# EAGLE board optics_r001 (EAGLE 7.7.0)

Size 65 x 38 mm. Coordinates in mm from the lower left corner, seen from the top.
Outline: 0,0 65,0 65,38 0,38 0,0
Copper layers (1*16): Top 0.035mm / dielectric 1.5mm / Bottom 0.035mm
Design rules "default": minimum track width 10mil, minimum drill 24mil, track to track 8mil, track to pad 8mil, pad to pad 8mil, via to via 8mil, smd to smd 8mil, copper to edge 40mil, drill to drill 8mil, minimum pad ring 10mil, minimum via ring 8mil, stop-mask expansion 4mil, vias tented up to drill 0mil, thermal gap 10mil
Net classes: 1 PWR: width 0.305 mm

## Footprints (pad centres in the part's own frame; a part is rotated, then mirrored left to right if it is on the bottom)
0805_WAVE = smd 1.3 x 1.6: 1 1.1,0; 2 -1.1,0
TO38-ICUT-PL_450B = drill 0.508 pad 0.813: 1 -0.715,0; 2 0,-0.715; 3 0.715,0
TO5-QP10-6 = drill 0.737: 1 0,2.54; 2 -2.54,0; 3 0,-2.54; 4 2.54,0; 5 1.796,1.796
1206_WAVE = smd 1.4 x 1.95: 1 1.4,0; 2 -1.4,0
M3 = drill 3.15 pad 6: 1 0,0
M2 = drill 2.1 pad 4: 1 0,0
V-LH09 = drill 1.55 pad 3.1: 1 -9,0; 2 9,0
SOT23-3 = smd 0.7 x 0.9: 1 -0.95,-1; 2 0.95,-1; 3 0,1
T93YB = drill 0.61: 1 -1.9,2.54; 2 0.64,0; 3 -1.9,-2.54
PAD_RECT_5X2.5 = smd 5 x 2.5: 1 0,0
PAD_CIRCLE_1.5 = smd 1.5 x 1.5: 1 0,0
PAD_OVAL_3X1.5 = smd 3 x 1.5: 1 0,0
PAD_CIRCLE_2 = smd 2 x 2: 1 0,0
MSOP8 = smd 1.45 x 0.45: 1 -2,0.975; 2 -2,0.325; 3 -2,-0.325; 4 -2,-0.975; 5 2,-0.975; 6 2,-0.325; 7 2,0.325; 8 2,0.975
MSOP8-TP = smd 1.45 x 0.45: 1 -2,0.975; 2 -2,0.325; 3 -2,-0.325; 4 -2,-0.975; 5 2,-0.975; 6 2,-0.325; 7 2,0.325; 8 2,0.975 | smd 1.75 x 2.4: 9 0,0
90120-0130 = drill 1 square: 1 0,11.43 | drill 1: 2 0,8.89; 3 0,6.35; 4 0,3.81; 5 0,1.27; 6 0,-1.27; 7 0,-3.81; 8 0,-6.35; 9 0,-8.89; 10 0,-11.43
MIKROBUS_BUS_SOCKET_NO_OUTLINE_COMPACT = drill 0.787 pad 1.524 square: 1 -11,9; 16 11.86,9 | drill 0.787 pad 1.524: 2 -11,6.46; 3 -11,3.92; 4 -11,1.38; 5 -11,-1.16; 6 -11,-3.7; 7 -11,-6.24; 8 -11,-8.78; 9 11.86,-8.78; 10 11.86,-6.24; 11 11.86,-3.7; 12 11.86,-1.16; 13 11.86,1.38; 14 11.86,3.92; 15 11.86,6.46
22-28-4030 = drill 1.016 pad 1.676 square: 1 0,2.54 | drill 1.016 pad 1.524 octagon: 2 0,0; 3 0,-2.54

## Placement (x,y rotation side)
C1  1u  [0805_WAVE]  18.5,16.5 180 top
C2  100n  [0805_WAVE]  34,24 270 bottom
C3  2.2n  [0805_WAVE]  34,19 90 bottom
C4  47n  [0805_WAVE]  38,33.5 0 bottom
C101  2p  [0805_WAVE]  56,28.5 90 top
C102  100p  [0805_WAVE]  48,27.5 0 top
C201  2p  [0805_WAVE]  47,33.5 270 top
C202  100p  [0805_WAVE]  55,34.5 180 top
C301  2p  [0805_WAVE]  47,9.5 270 top
C302  100p  [0805_WAVE]  55,10.5 180 top
C401  2p  [0805_WAVE]  56,4.5 90 top
C402  100p  [0805_WAVE]  48,3.5 0 top
D1  PL_450B  [TO38-ICUT-PL_450B]  31,19 270 top
D2  QP10-6  [TO5-QP10-6]  51.5,19 0 top
DS1  P5V  [1206_WAVE]  4,25.5 0 top
DS2  P3_3V  [1206_WAVE]  4,19.5 0 top
DS3  LSR_ENB  [1206_WAVE]  4,28.5 0 top
DS4  P5V_LSR  [1206_WAVE]  4,22.5 0 top
DS5  ID1  [1206_WAVE]  41.5,29 0 top
DS6  ID2  [1206_WAVE]  61.5,29 0 top
DS7  ID3  [1206_WAVE]  61.5,9 0 top
DS8  ID4  [1206_WAVE]  41.5,9 0 top
MH1  MTG_HOLE/M3  [M3]  42.5,19 0 top
MH2  MTG_HOLE/M2  [M2]  61.5,35 90 top
MH3  MTG_HOLE/M2  [M2]  61.5,3 0 top
MP1  [V-LH09]  31,19 90 top
Q1  Si2333DDS  [SOT23-3]  15,19.5 180 top
Q2  Si2342DS  [SOT23-3]  15,28.5 180 top
R1  22k  [0805_WAVE]  15.5,24 270 top
R2  10k  [0805_WAVE]  13.5,24 270 top
R3  0.92  [1206_WAVE]  36.5,19 270 bottom
R4  10k  [T93YB]  32,34.5 90 top
R5  4.7k  [0805_WAVE]  38,35.5 180 bottom
R6  150  [0805_WAVE]  9,25.5 0 top
R7  68  [0805_WAVE]  9,19.5 0 top
R8  68  [0805_WAVE]  9,28.5 0 top
R9  137  [0805_WAVE]  9,22.5 0 top
R10  82  [0805_WAVE]  42,27 180 top
R11  150  [0805_WAVE]  62,27 180 top
R12  82  [0805_WAVE]  62,11 180 top
R13  150  [0805_WAVE]  42,11 180 top
R101  10k  [0805_WAVE]  52.5,29.5 180 bottom
R102  100  [0805_WAVE]  52.5,27.5 0 top
R201  10k  [0805_WAVE]  50,32.5 0 bottom
R202  100  [0805_WAVE]  50.5,34.5 180 top
R301  10k  [0805_WAVE]  50.5,8.5 0 bottom
R302  100  [0805_WAVE]  50.5,10.5 180 top
R401  10k  [0805_WAVE]  52.5,5.5 180 bottom
R402  100  [0805_WAVE]  52.5,3.5 0 top
RK1  0  [0805_WAVE]  24.5,23.5 180 bottom
RK2  0  [0805_WAVE]  24.5,25 180 bottom
TP1  [PAD_RECT_5X2.5]  9,25.5 180 bottom
TP2  [PAD_RECT_5X2.5]  9,22.5 180 bottom
TP3  [PAD_RECT_5X2.5]  9,19.5 180 bottom
TP5  [PAD_CIRCLE_1.5]  36.5,15.5 270 bottom
TP6  [PAD_CIRCLE_1.5]  36.5,22.5 90 bottom
TP7  [PAD_OVAL_3X1.5]  25.5,19 270 bottom
TP8  [PAD_OVAL_3X1.5]  27.5,19 270 bottom
TP9  [PAD_CIRCLE_2]  24.5,36 270 top
TP10  [PAD_CIRCLE_1.5]  34.5,35.5 0 bottom
TP101  [PAD_CIRCLE_1.5]  56,29.5 180 bottom
TP102  [PAD_CIRCLE_1.5]  56,27.5 180 bottom
TP103  [PAD_CIRCLE_2]  47,30 180 top
TP201  [PAD_CIRCLE_1.5]  47,32.5 0 bottom
TP202  [PAD_CIRCLE_1.5]  47,34.5 0 bottom
TP203  [PAD_CIRCLE_2]  56,32 0 top
TP301  [PAD_CIRCLE_1.5]  47,8.5 0 bottom
TP302  [PAD_CIRCLE_1.5]  47,10.5 0 bottom
TP303  [PAD_CIRCLE_2]  56,8 0 top
TP401  [PAD_CIRCLE_1.5]  56,5.5 180 bottom
TP402  [PAD_CIRCLE_1.5]  56,3.5 180 bottom
TP403  [PAD_CIRCLE_2]  47,6 180 top
U1  OPA2380  [MSOP8]  51.5,31 180 top
U2  OPA2380  [MSOP8]  51.5,7 0 top
U3  iC-HKB  [MSOP8-TP]  29.5,24 180 bottom
X1  [90120-0130]  21.5,3 90 top
X2  [90120-0130]  21.5,6 90 top
X3  MikroBus_3  [MIKROBUS_BUS_SOCKET_NO_OUTLINE_COMPACT]  12,23.5 90 top
X4  PWM_1  [22-28-4030]  3,5.5 0 top
X5  PWM_2  [22-28-4030]  6,5.5 0 top

## Library data of the parts
C1-C4 C101 C102 C201 C202 C301 C302 C401 C402 = rcl
D1 = diode; MFR: OSRAM; MPN: PL_450B; PKG: TO-38
D2 = diode; MFR: First Sensor; MPN: QP10-6; PKG: TO-5
DS1 DS2 DS4 DS8 = diode; ANGLE: 120; I_F: 20mA; LUM: 150mcd; MPN: APT3216SYCK; V_F: 2
DS3 DS6 = diode; ANGLE: 120; I_F: 20mA; LUM: 150mcd; MPN: APT3216SURCK; V_F: 1.95
DS5 DS7 = diode; ANGLE: 120; I_F: 20mA; LUM: 100mcd; MPN: APT3216QBC/D; V_F: 3.3
MH1-MH3 = mechanical
MP1 = mechanical; MPN: V-LH09
Q1 = transistor; MFR: Vishay; MPN: Si2333DDS; PKG: SOT-23
Q2 = transistor; MFR: Vishay; MPN: Si2342DS; PKG: SOT-23
R1 R2 R5-R13 R101 R102 R201 R202 R301 R302 R401 R402 RK1 RK2 = rcl; PKG: 0805; PWR: 0.125
R3 = rcl; PKG: 1206; PWR: 0.25
R4 = rcl; MFR: Vishay; MPN: T93YB103KT20
TP1-TP3 TP5-TP10 TP101-TP103 TP201-TP203 TP301-TP303 TP401-TP403 = pad
U1 U2 = ic; MFR: TI; MPN: OPA2380AIDGKT; PKG: MSOP8
U3 = ic; MFR: iC-Haus; MPN: iC-HK/B; PKG: MSOP8
X1 X2 = io; MFR: Molex; MPN: 90120-0130
X3 = io
X4 X5 = io; MFR: Molex; MPN: 22-28-4030

## Nets
GND: C1.2 C2.2 C4.2 C102.2 C202.2 C302.2 C402.2 D1.2 DS1.2 DS2.2 DS3.2 DS4.2 DS5.2 DS6.2 DS7.2 DS8.2 MH1.1 MH2.1 MH3.1 MP1.1 MP1.2 Q2.2 R5.2 RK1.2 RK2.2 U1.3 U1.4 U1.5 U2.3 U2.4 U2.5 U3.6 U3.9 X2.10 X3.8 X3.9 X4.3 X5.3
LED_3_3V_ANODE: DS2.1 R7.2
LED_5V_ANODE: DS1.1 R6.2
LED_5V_LSR_ANODE [LSR_EN_CH]: DS4.1 R9.2
LED_ID1_ANODE: DS5.1 R10.2
LED_ID2_ANODE: DS6.1 R11.2
LED_ID3_ANODE: DS7.1 R12.2
LED_ID4_ANODE: DS8.1 R13.2
LED_LSR_ENB_ANODE: DS3.1 R8.2
LSR_DRV_AGND_CH1: RK1.1 U3.2
LSR_DRV_AGND_CH2: RK2.1 U3.4
LSR_EN_CH1 [LSR_EN_CH]: TP7.1 U3.1 X1.4
LSR_EN_CH2 [LSR_EN_CH]: TP8.1 U3.5 X1.5
LSR_ENB: Q2.1 R4.1 R8.1 TP9.1 X1.3
LSR_ENB_NMOS_DRAIN: Q2.3 R1.2 R2.2
LSR_ENB_PMOS_GATE: Q1.1 R1.1
LSR_ILIM_VSENSE: C4.1 R4.3 R5.1 TP10.1 U3.8 X2.3
LSR_ISENSE_LS_N: R3.2 TP6.1 U3.3 X2.5
LSR_ISENSE_LS_P: C3.2 D1.3 R3.1 TP5.1 X2.4
P3_3V [PWR]: R7.1 TP3.1 X2.1 X3.7
P5V [PWR]: D2.5 Q1.2 R2.1 R6.1 R10.1 R11.1 R12.1 TP1.1 U1.8 U2.8 X1.1 X3.10 X4.2 X5.2
P5V_LSR [PWR]: C1.1 C2.1 C3.1 D1.1 Q1.3 R9.1 TP2.1 U3.7
RB1_MB2_CS: X1.6 X3.3
RD0_PWM1: X1.2 X4.1
RD3_PWM4: X2.2 X5.1
RE9_MB2_INT2: X1.10 X3.15
RG6_SPI2_SCK: X1.7 X3.4
RG7_SPI2_MISO: X1.8 X3.5
RG8_SPI2_MOSI: X1.9 X3.6
RX_AMP1_OUT: C102.1 R101.2 R102.2 TP103.1 X2.6
RX_AMP2_OUT: C202.1 R201.2 R202.2 TP203.1 X2.7
RX_AMP3_OUT: C302.1 R301.2 R302.2 TP303.1 X2.8
RX_AMP4_OUT: C402.1 R401.2 R402.2 TP403.1 X2.9
RX_OPAMP_OUT1: C101.2 R102.1 TP102.1 U1.1
RX_OPAMP_OUT2: C201.2 R202.1 TP202.1 U1.7
RX_OPAMP_OUT3: C301.2 R302.1 TP302.1 U2.1
RX_OPAMP_OUT4: C401.2 R402.1 TP402.1 U2.7
RX_QP_CH1 [RX_AMP_PRE]: C101.1 D2.1 R101.1 TP101.1 U1.2
RX_QP_CH2 [RX_AMP_PRE]: C201.1 D2.2 R201.1 TP201.1 U1.6
RX_QP_CH3 [RX_AMP_PRE]: C301.1 D2.3 R301.1 TP301.1 U2.2
RX_QP_CH4 [RX_AMP_PRE]: C401.1 D2.4 R401.1 TP401.1 U2.6

## Tracks (layer width: path | path; a pad name or v marks a point on that pad's centre or on a via)
GND  (37 unrouted)
LED_3_3V_ANODE  (1 unrouted)
LED_5V_ANODE  (1 unrouted)
LED_5V_LSR_ANODE  (1 unrouted)
LED_ID1_ANODE  (1 unrouted)
LED_ID2_ANODE  (1 unrouted)
LED_ID3_ANODE  (1 unrouted)
LED_ID4_ANODE  (1 unrouted)
LED_LSR_ENB_ANODE  (1 unrouted)
LSR_DRV_AGND_CH1  (1 unrouted)
LSR_DRV_AGND_CH2  (1 unrouted)
LSR_EN_CH1  (2 unrouted)
LSR_EN_CH2  (2 unrouted)
LSR_ENB  (4 unrouted)
LSR_ENB_NMOS_DRAIN  (2 unrouted)
LSR_ENB_PMOS_GATE  (1 unrouted)
LSR_ILIM_VSENSE  (5 unrouted)
LSR_ISENSE_LS_N  (3 unrouted)
LSR_ISENSE_LS_P  (4 unrouted)
P3_3V  (3 unrouted)
P5V  (13 unrouted)
P5V_LSR  (7 unrouted)
RB1_MB2_CS  (1 unrouted)
RD0_PWM1  (1 unrouted)
RD3_PWM4  (1 unrouted)
RE9_MB2_INT2  (1 unrouted)
RG6_SPI2_SCK  (1 unrouted)
RG7_SPI2_MISO  (1 unrouted)
RG8_SPI2_MOSI  (1 unrouted)
RX_AMP1_OUT  (4 unrouted)
RX_AMP2_OUT  (4 unrouted)
RX_AMP3_OUT  (4 unrouted)
RX_AMP4_OUT  (4 unrouted)
RX_OPAMP_OUT1  (3 unrouted)
RX_OPAMP_OUT2  (3 unrouted)
RX_OPAMP_OUT3  (3 unrouted)
RX_OPAMP_OUT4  (3 unrouted)
RX_QP_CH1  (4 unrouted)
RX_QP_CH2  (4 unrouted)
RX_QP_CH3  (4 unrouted)
RX_QP_CH4  (4 unrouted)